# Altium PCB ADF4351.PcbDoc
Units mil, origin at the board's own origin, x right, y up, seen from the top; angles counter-clockwise.
Board outline 1870.03 x 1970 mil, 2 copper layers (Top Layer, Bottom Layer); 69 components, 32 nets, 188 pads, 300 vias.
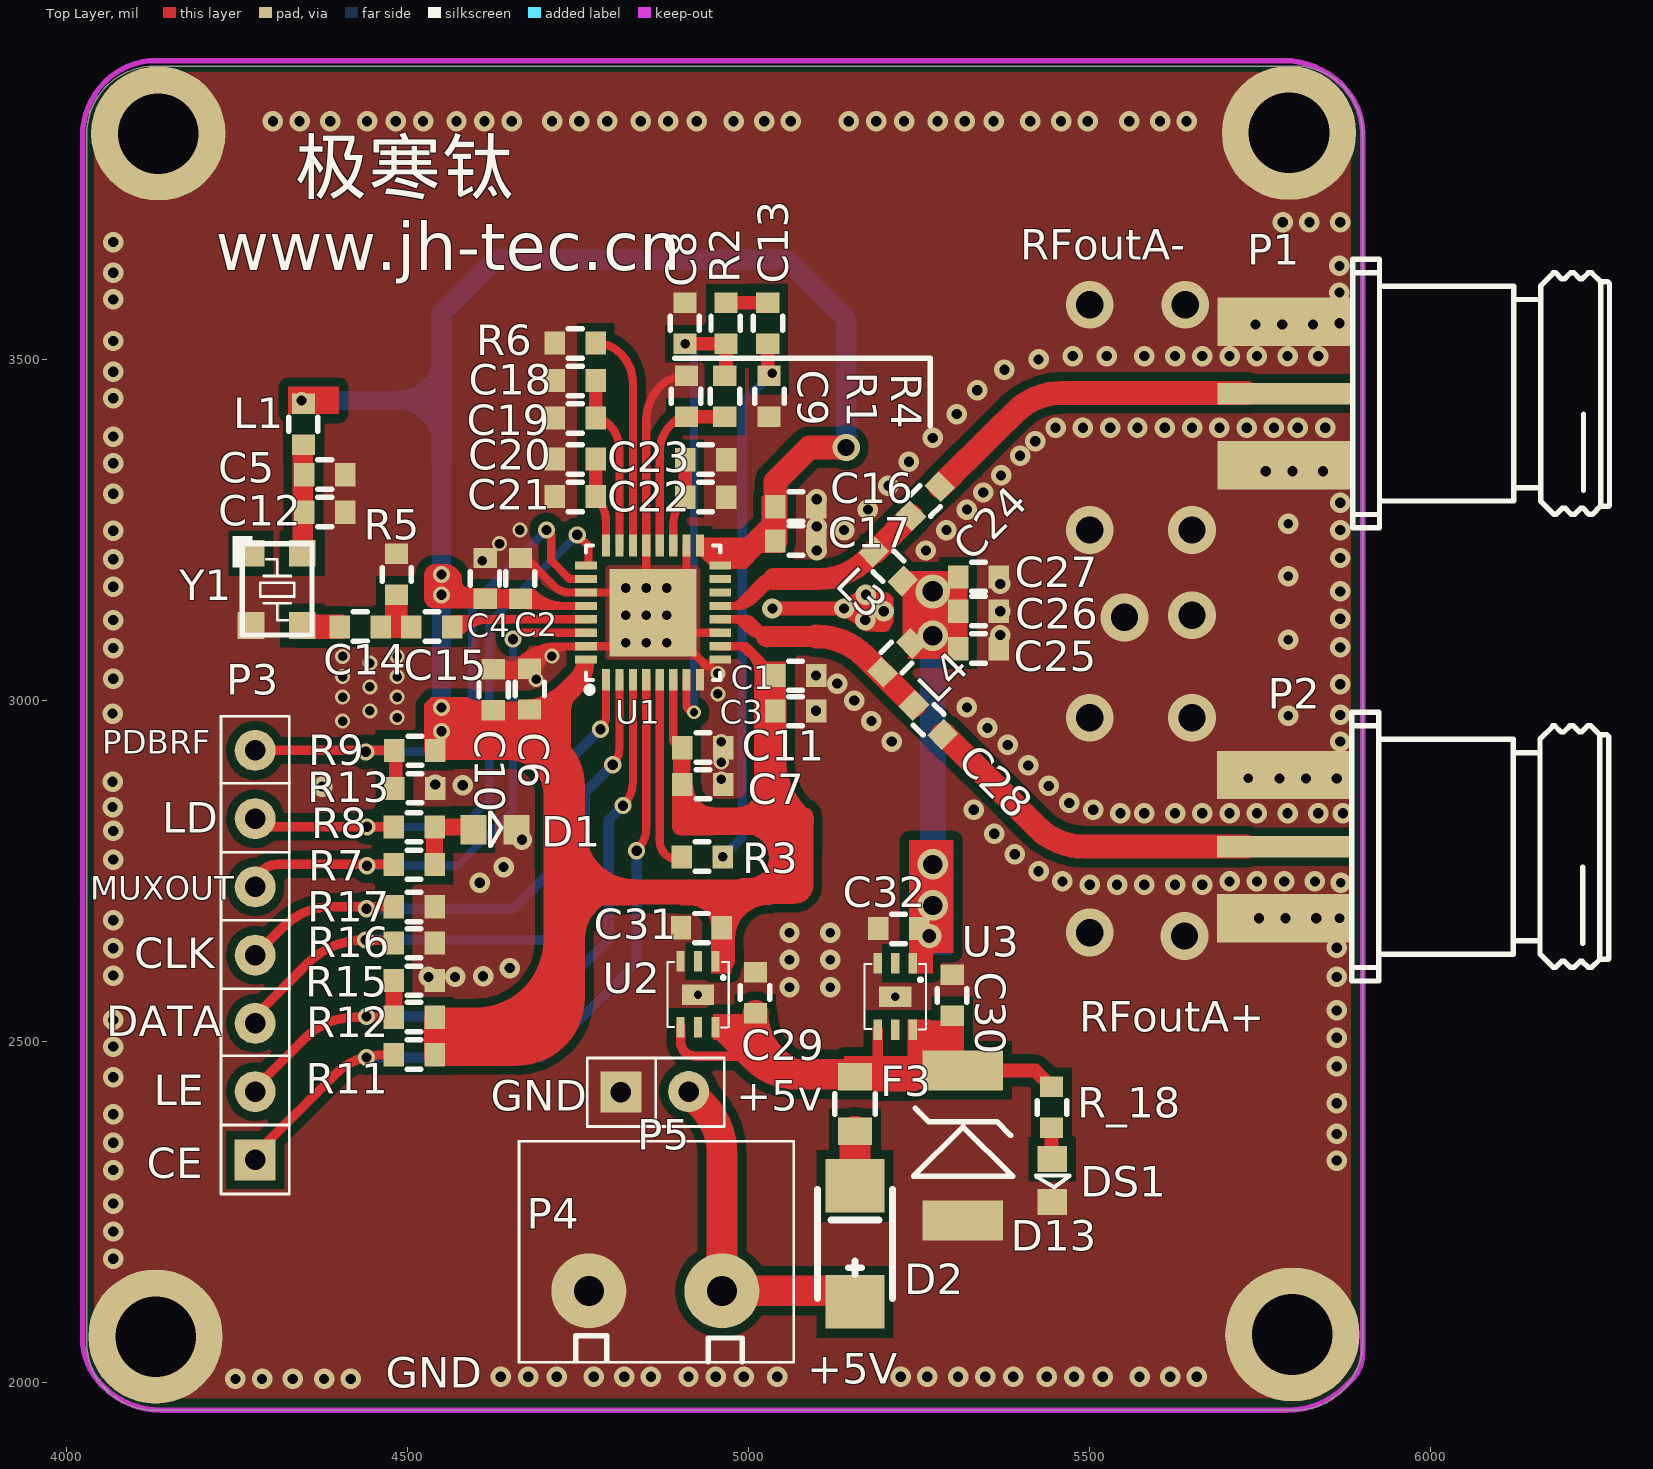
[diagram p0: Top Layer view]
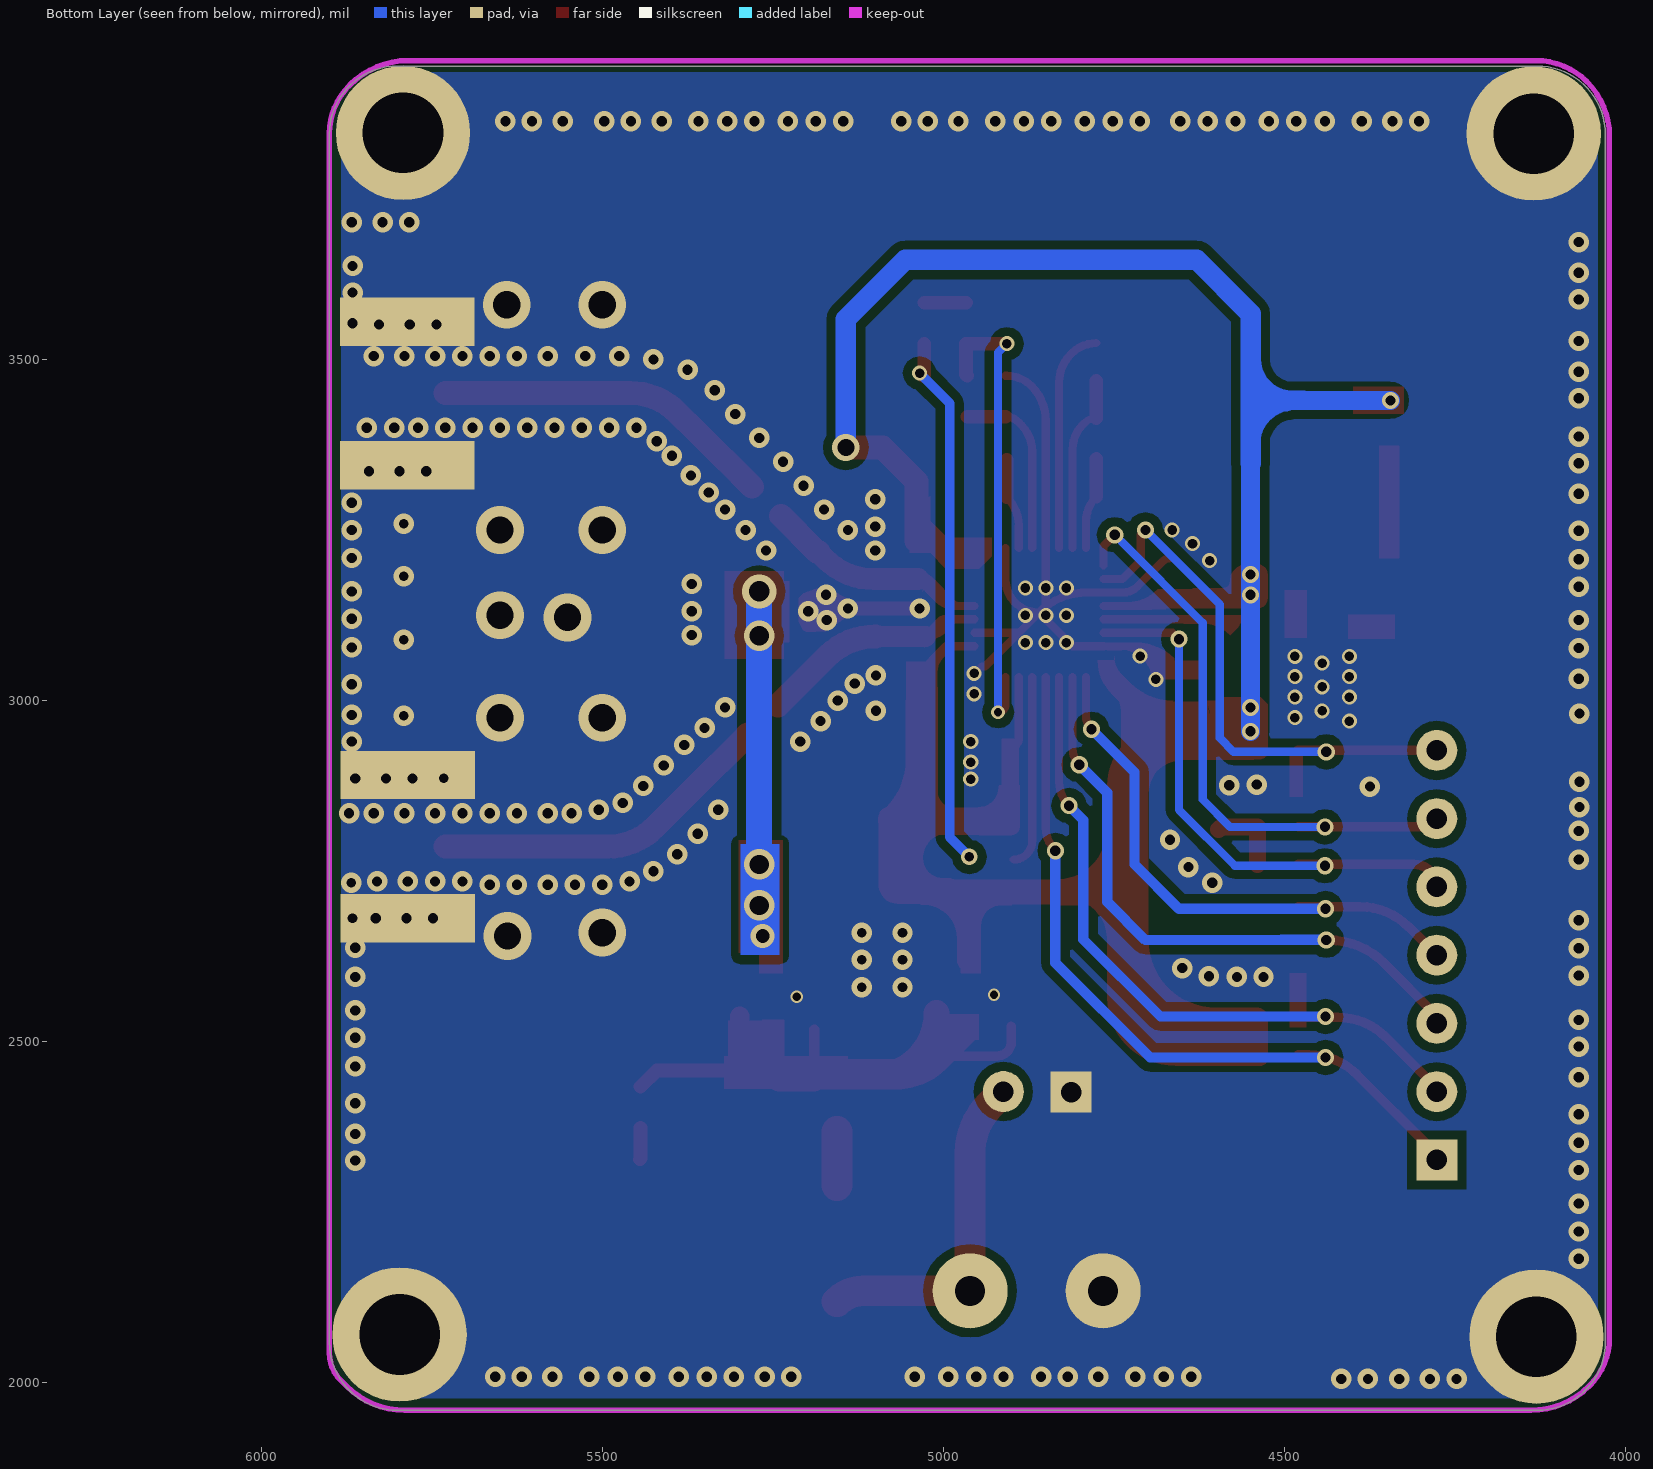
[diagram p1: Bottom Layer view, seen from below]

## Layer stack, top to bottom
Top Solder: solder mask 0.4, Solder Resist, Dk 3.5
Top Layer: signal copper 1.4
Dielectric 1: dielectric 12.6, FR-4, Dk 4.8
Bottom Layer: signal copper 1.4
Bottom Solder: solder mask 0.4, Solder Resist, Dk 3.5

## Board outline
4260,1960 5800.01,1960 ccw(c5800.01,2060) 5900.01,2060 5900.01,2177.99 5900.01,3830 ccw(c5800.01,3830) 5800.01,3930 5180,3930 4129.98,3930 ccw(c4129.98,3830) 4029.98,3830 4029.98,3553 4029.98,2060 ccw(c4129.98,2060) 4129.98,1960 4380,1960

## Design rules (kind name [scope] priority, off if disabled: settings)
Clearance Clearance_1 [InPolygon] p1: gap=13 ignorepadtopadclearanceinfootprint=FALSE except(0: Arc-Hole Track-Hole SMDPad-Hole THPad-Hole Via-Hole Fill-Hole Poly-Hole Region-Hole Text-Hole)
Clearance [All] p2: gap=7 ignorepadtopadclearanceinfootprint=FALSE except(0: Arc-Hole Track-Hole SMDPad-Hole THPad-Hole Via-Hole Fill-Hole Poly-Hole Region-Hole Text-Hole)
PolygonConnect [All] p1: connectstyle=Direct reliefconductorwidth=10 reliefentries=4 polygonreliefangle="90 Angle" airgapwidth=10
RoutingVias [All] p1: holewidth=28 width=50 viastyle="Through Hole" minholewidth=28 minwidth=50 maxholewidth=28 maxwidth=50
SolderMaskExpansion [All] p1: expansion=4
Width [All] p1: maxlimit=196.85 minlimit=0.39 preferedwidth=10
30 further rules are at their usual default settings.

## Classes and differential pairs
component class ADF4351: C1 C2 C3 C4 C5 C6 C7 C8 C9 C10 C11 C12 C13 C14 C15 C16 C17 C18 C19 C20 C21 C22 C23 C24 C25 C26 C27 C28 C29 C30 C31 C32 D1 D2 D13 DS1 F3 L1 L3 L4 P1 P2 P3 P4 P5 R1 R2 R3 R4 R5 R6 R7 R8 R9 R11 R12 R13 R15 R16 R17 R_18 U1 U2 U3 Y1

## Components (designator, comment, footprint, x,y, rotation, side; value= is the part's Value field where it differs from the comment)
C1 "0.1uF" 0603R 5069,3035 r90 top
C2 "0.1uF" 0603R 4664,3179 r0 top
C3 "10pF" 0603R 5069,2983 r90 top
C4 "10pF" 0603R 4612,3179 r0 top
C5 "1uF" 0603R 4379,3333 r270 top
C6 "0.1uF" 0603R 4681,3017 r180 top
C7 "0.1uF" 0603R 4933,2879 r270 top
C8 "188pF" 0603R 4905,3553 r0 top
C9 "85pF" 0603R 4907,3446 r0 top
C10 "10pF" 0603R 4628,3016 r180 top
C11 "10pF" 0603R 4933,2933 r270 top
C12 "100pF" 0603R 4379,3278 r270 top
C13 "2.5nF" 0603R 5030,3553 r180 top
C14 "1nF" 0603R 4431,3110 r270 top
C15 "1nF" 0603R 4536,3110 r270 top
C16 "0.01uF" 0603R 5069.29,3285.96 r270 top
C17 "0.1uF" 0603R 5069.29,3235.96 r270 top
C18 "10pF" 0603R 4746,3467 r90 top
C19 "0.1uF" 0603R 4746,3412 r90 top
C20 "10pF" 0603R 4746,3352 r90 top
C21 "0.1uF" 0603R 4746,3297 r90 top
C22 "10pF" 0603R 4937,3300 r270 top
C23 "0.1uF" 0603R 4937,3355 r270 top
C24 "1uF" 0603R 5257.8,3293.63 r315 top
C25 "0.01uF" 0603R 5337,3078 r270 top
C26 "0.1uF" 0603R 5337,3133 r270 top
C27 "0.01uF" 0603R 5337,3183 r270 top
C28 "1uF" 0603R 5265,2973 r225 top
C29 "0.47uF" 0603R 5008,2572 r0 top
C30 "0.47uF" 0603R 5296.59,2568 r0 top
C31 "0.47uF" 0603R 4931,2665 r90 top
C32 "0.47uF" 0603R 5220,2664 r90 top
D1 "LED" 0603_LED 4625,2810 r0 top
D2 "SS34" SS34 5161,2189 r90 top
D13 "SMBJ05A" SMBJ 5314,2343 r90 top
DS1 "LED" 0603_LED 5444,2300 r270 top
F3 "Fuse" 0805+ 5156,2409 r270 top
L1 "10uH" 0603R 4346,3405 r0 top
L3 "3.9nH" 0603R 5206,3198 r225 top
L4 "3.9nH" 0603R 5216,3064 r315 top
P1 "SMA" SMA_3D 5820,3449 r0 top
P2 "SMA" SMA_3D 5819,2785 r0 top
P3 "Header 7" HDR1X7 4285,2632 r90 top
P4 "Header 2" DC2 4866,2181 r0 top
P5 "Header 2" HDR1X2 4866,2434 r0 top
R1 "1.8k" 0603R 4967,3446 r180 top
R2 "870R" 0603R 4965,3553 r0 top
R3 "NC" 0603R 4932,2773 r270 top
R4 "0R" 0603R 5032,3446 r180 top
R5 "51Ω" 0603R 4486,3185 r180 top
R6 "4K7" 0603R 4746,3522 r90 top
R7 "NC" 0603R 4510,2758 r90 top
R8 "560R" 0603R 4510,2813 r90 top
R9 "0R" 0603R 4511,2925 r90 top
R11 "10K" 0603R 4510,2483 r270 top
R12 "NC" 0603R 4510,2538 r270 top
R13 "NC" 0603R 4511,2873 r270 top
R15 "10K" 0603R 4510,2588 r90 top
R16 "10K" 0603R 4510,2643 r90 top
R17 "10K" 0603R 4510,2696 r90 top
R_18 "2k" 0603R 5446,2404 r180 top
U1 "ADF4351BCPZ" ADF4351 4857,3130 r0 top
U2 "lp5900_3.3V" WSON-6_2.5x2.2mm 4926,2572 r180 top (schematic designator IC1)
U3 "lp5900_3.3V" WSON-6_2.5x2.2mm 5215,2569 r180 top (schematic designator IC2)
Y1 "100MHz" X3225 4309,3163 r270 top
? "Comment" PAD 4134,3832 r180 top
? "Comment" PAD 4130,2069 r180 top
? "Comment" PAD 5796,2072 r180 top
? "Comment" PAD 5791,3833 r180 top

## Footprints (in the part's own frame and the unit in brackets; to place one, negate y for a bottom-side part, rotate by r counter-clockwise, add the part's x,y. Pads: shape width x height; smd on the part's side, far side on the other; paste and mask are expansions set on the pad)
0603_LED [mil]
  rect 37.99x43.31 smd: 1(-28,1) 2(35,1)
  silkscreen extent -4,-23 13,26
0603R [mil]
  rect 34x30 smd: 1(2,-30) 2(2,30)
  silkscreen extent -20,-10 23,10, body extent -17,-38 21,38, height 20
0805+ [mil]
  rect 40x50 smd: 1(-40,0) 2(40,0)
  silkscreen extent -15,-30 15,30, body extent -56,-26 56,26, height 20
ADF4351 [mil]
  rect 12x32 smd mask+5: 1(-65.9,-99.44) 2(-46.21,-99.44) 3(-26.53,-99.44) 4(-6.84,-99.44) 5(12.84,-99.44) 6(32.53,-99.44) 7(52.21,-99.44) 8(71.9,-99.44) 17(71.9,97.44) 18(52.21,97.44) 19(32.53,97.44) 20(12.84,97.44) 21(-6.84,97.44) 22(-26.53,97.44) 23(-46.21,97.44) 24(-65.9,97.44)
  rect 32x12 smd mask+5: 9(101.44,-69.9) 10(101.44,-50.21) 11(101.44,-30.53) 12(101.44,-10.84) 13(101.44,8.84) 14(101.44,28.53) 15(101.44,48.21) 16(101.44,67.9) 25(-95.44,67.9) 26(-95.44,48.21) 27(-95.44,28.53) 28(-95.44,8.84) 29(-95.44,-10.84) 30(-95.44,-30.53) 31(-95.44,-50.21) 32(-95.44,-69.9)
  rect 128x128 smd mask-63.5: 33(3,-1)
  silkscreen extent -96,-118 102,98, body extent -96,-100 102,98, height 43
DC2 [mil]
  round 110 hole 44: 1(-100,-46) 2(95,-46)
  silkscreen extent -202,-151 200,173, body extent -199,-146 195,169, height 433
HDR1X2 [mil]
  rect 60x60 hole 30: 1(-53.15,-7.87)
  round 60 hole 30: 2(46.26,-6.89)
  silkscreen extent -102,-58 98,42, body extent -102,-58 98,42, height 336
HDR1X7 [mil]
  rect 60x60 hole 30: 1(-305,8)
  round 60 hole 30: 2(-205,8) 3(-105,8) 4(-5,8) 5(95,8) 6(195,8) 7(295,8)
  silkscreen extent -355,-42 345,58, body extent -355,-42 345,58, height 336
PAD [mm]
  round 5 hole 3: 0(-0.025,0.025)
  body extent -2.91,-2.5 2.86,2.55, height 10
SMA_3D [mil]
  rect 196.85x31.5 smd: 1(-34,1)
  rect 196.85x70.87 smd: 2(-34,-104) 2(-34,106)
  rect 196.85x70.87 smd far side: 2(-34,-104) 2(-34,106)
  silkscreen extent 65,-196 442,198, body extent -134,-186 428,188, height 171
SMBJ [mm]
  rect 1.5x3 smd: 1(-2.667,0) 2(2.921,0)
  silkscreen extent -1.02,-1.85 1.52,1.83
SS34 [mm]
  rect 2x2.2 smd: 1(-1.778,0.127) 2(2.54,0.127)
  silkscreen extent -1.65,-1.27 2.41,1.52
WSON-6_2.5x2.2mm [mil]
  rect 12x30 smd paste+0 mask+0: 1(-25.59,-46) 2(0,-46) 3(25.59,-46) 4(25.59,51) 5(0,51) 6(-25.59,51)
  rect 47.24x29.53 smd: 7(0,3)
  silkscreen extent -45,-45 45,51, body extent -39,-45 39,53, height 31
X3225 [mil]
  rect 39.37x39.37 smd: 1(-53,-38) 2(53,-38) 3(53,37) 4(-53,37)
  silkscreen extent -78,-65 67,51, body extent -61,-50 65,48, height 28

## Part data
C1 C2 C3 C4 C5 C6 C7 C8 C9 C10 C11 C12 C13 C14 C15 C16 C17 C18 C19 C20 C21 C22 C23 C24 C25 C26 C27 C28: library part C, "Unpolar Capacitor"
C29 C30 C31 C32: library part cap
D1: library part LED_0603
D2: library part D, "1N4148"
D13: library part SMBJ, "TVS"
F3: library part "Fuse 2"
L1 L3 L4: library part INDUCTOR
P1 P2: "Port for HF signal"
P3: "Header, 7-Pin"
P4 P5: "Header, 2-Pin"
R1 R2 R3 R4 R5 R6 R7 R8 R9 R11 R12 R13 R15 R16 R17: library part R, "Resister"
R_18: library part RES0805
U1: "Wideband Synthesizer with Integrated VCO"
U2 U3: library part lp5900
Y1: library part XTALCOSC, "XTAL"

## Via types
v1: diameter 30, hole 15, Top Layer to Bottom Layer, tented both sides, 216 vias
v2: diameter 22, hole 14, Top Layer to Bottom Layer, tented both sides, 32 vias
v3: diameter 25, hole 15, Top Layer to Bottom Layer, tented both sides, 19 vias
v4: diameter 30, hole 14, Top Layer to Bottom Layer, tented both sides, 13 vias
v5: diameter 70, hole 40, Top Layer to Bottom Layer, tented both sides, 10 vias
v6: diameter 45, hole 28, Top Layer to Bottom Layer, tented both sides, 3 vias
v7: diameter 18, hole 12, Top Layer to Bottom Layer, tented both sides, 2 vias
v8: diameter 35, hole 20, Top Layer to Bottom Layer, tented both sides, 1 vias
v9: diameter 50, hole 30, Top Layer to Bottom Layer, tented both sides, 1 vias
v10: diameter 40, hole 25, Top Layer to Bottom Layer, tented both sides, 1 vias
v11: diameter 24, hole 14, Top Layer to Bottom Layer, tented both sides, 1 vias
v12: diameter 20, hole 12, Top Layer to Bottom Layer, tented both sides, 1 vias

## Nets (pads, with @x,y where several pads share a name; then routed paths per layer and width w, separated by ;. In a path a pad name is that pad's centre, name@x,y a point inside that pad or via, vN(x,y) a via of type N, cw(c..) or ccw(c..) an arc to the next point about the centre after c; other vN are vias at no path point)
5V: C29.1 C30.1 D13.2 F3.1 R_18.1 U2.4 U2.6 U3.4 U3.6 | length 693.9
  Top Layer w14: U2.4@4900.41,2523 4900.41,2500.59 ccw(c4922,2500.59) 4922,2479 5011.29,2479 ccw(c5011.29,2492.18) 5024.47,2492.18
  Top Layer w15: 5187.59,2446 ccw(c5183.2,2450.39) 5189.41,2450.39 ; 5189.41,2446 U3.4
  Top Layer w20: D13.2 5420,2458 R_18.1
  Top Layer w28: 5250.59,2483 ccw(c5250.59,2531) 5298.59,2531 C30.1
  Top Layer w38: C29.1 ccw(c5103,2542) 5024.47,2492.18 ccw(c5103,2542) F3.1@5133.55,2454.16 ; 5189.41,2446 5240.59,2446
AVDD: C1.2 C2.1 C3.2 C4.1 C6.2 C7.1 C10.2 C11.1 C16.1 C17.1 C31.1 L1.2 R9.1 R11.2 R12.2 U1.6 U1.10 U1.16 U1.17 U1.28 U1.32 U2.1 | length 2219.6
  Top Layer w12: C2.1@4666,3148 ccw(c4685.69,3167.69) 4685.69,3139.84 ; 4696.69,3138.84 U1.28@4765.5,3138.84 ; U1.6@4889.53,3034.5 4889.53,2944.47 ccw(c4903,2944.47) C11.1 ; U1.10@4954.5,3079.79 4996.21,3079.79 C1.2
  Top Layer w35: C17.1 5039.29,3321.29 5089,3371 v10(5143,3371)
  Bottom Layer w28: v3(4345,3440) 4485,3440 cw(c4485,3375) 4550,3375 ; v3(4550,2955) v3(4550,3185) 4550,3348
  Bottom Layer w30: 4550,3348 4550,3375 4550,3567 4629,3646 5056,3646 5143,3559 v10(5143,3371)
  other v3: 4550,2990 4550,3155
CE: P3.1 R11.1 U1.4 | length 1142.2
  Top Layer w12: v3(4836,2780) ccw(c4801.82,2814.18) 4850.16,2814.18 U1.4@4850.16,3034.5
  Top Layer w14: P3.1 cw(c4296.31,2327) 4282.66,2340.66 4393.71,2451.71 cw(c4464.42,2381) 4464.42,2481 R11.1
  Bottom Layer w15: v3(4440,2477) 4697,2477 4836,2616 v3(4836,2780)
CLK: P3.4 R17.2 U1.1 | length 837.8
  Top Layer w12: v3(4783,2958) ccw(c4763.44,2977.56) 4791.1,2977.56 U1.1@4791.1,3034.5
  Top Layer w14: P3.4 4318.71,2668.71 cw(c4389.42,2598) 4389.42,2698 R17.2
  Bottom Layer w15: v3(4440,2695) 4655,2695 4720,2760 4720,2895 v3(4783,2958)
DATA: P3.3 R16.2 U1.2 | length 1012.5
  Top Layer w12: v3(4801,2906) ccw(c4777.37,2929.63) 4810.79,2929.63 U1.2@4810.79,3034.5
  Top Layer w14: P3.3 cw(c4289.07,2527) P3.3@4280.54,2535.54 ; P3.3@4278.54,2539.54 4354.94,2615.94 ; 4353.8,2615.09 cw(c4435.66,2533.23) 4435.66,2649 R16.2@4480,2649
  Bottom Layer w12: v3(4439,2649) 4441,2651 4504.58,2651
  Bottom Layer w15: v3(4439,2649) 4704,2649 4760,2705 4760,2865 v3(4801,2906)
GND: ?.0 C1.1 C2.2 C3.1 C4.2 C5.2 C6.1 C7.2 C8.2 C9.2 C10.1 C11.2 C12.2 C16.2 C17.2 C18.2 C19.2 C20.2 C21.2 C22.2 C23.2 C25.2 C26.2 C27.2 C29.2 C30.2 C31.2 C32.2 D1.2 D13.1 DS1.2 P1.2 P2.2 P4.1 P5.1 R4.2 R5.1 R6.2 R13.2 R15.1 R16.1 R17.1 U1.8 U1.9 U1.11 U1.18 U1.21 U1.27 U1.31 U1.33 U2.3 U2.7 U3.3 U3.7 Y1.2 | length 1139.4
  Top Layer w12: C2.2 cw(c4666,3189.69) 4679.66,3203.34 4716,3167 ccw(c4736.45,3187.45) 4736.45,3158.53 4765.5,3158.53 4789.05,3158.53 cw(c4789.05,3058.53) U1.33@4859.76,3129.24 ; U1.31@4765.5,3079.79 4810.79,3079.79 U1.33 ; v2(4850,3125) 4855.52,3125 U1.33@4859.76,3129.24 ; C9.2 4907.21,3476 ccw(c4907.21,3424.79) 4871,3461 ccw(c4921.32,3410.68) 4850.16,3410.68 4850.16,3223.5 4850.16,3138.84 U1.33@4859.76,3129.24 ; U1.18@4909.21,3223.5 4909.21,3178.21 cw(c4860,3178.21) U1.33 ; 4944,3050 4939,3050 U1.33@4889.53,3099.47 ; U1.11@4954.5,3099.47 U1.33@4889.53,3099.47 ; U1.33 U1.33@4889.53,3099.47
  Top Layer w20: v1(5035,3135) v1(5140,3135)
  other v1: 4248,2006 4287,2006 4332,2006 4378,2006 4417,2006 4637,2009 4677,2009 4719,2009 4773,2009 4818,2009 4857,2009 4912,2009 4952,2009 4993,2009 5042,2009 5223,2009 5262,2009 5307,2009 5347,2009 5388,2009 5437,2009 5477,2009 5519,2009 5573,2009 5618,2009 5657,2009 4069,2182 4069,2222 4069,2263 4069,2312 5862,2326 4069,2352 5862,2365 4069,2394 5862,2410 4069,2448 5862,2464 4069,2493 5862,2506 4069,2532 5862,2546 4531,2595 4570,2595 5862,2595 4611,2596 4069,2597 4650,2608 4069,2637 5862,2638 4069,2678 5748,2681 5787,2681 5832,2681 5500,2730 5540,2730 5580,2730 5625,2730 5665,2730 4606,2733 5460,2735 5705,2735 5745,2735 5785,2735 5830,2735 5425,2750 4641,2756 4069,2767 5390,2775 4668,2796 5360,2805 4069,2809 5545,2835 5580,2835 5625,2835 5665,2835 5705,2835 5745,2835 5790,2835 5835,2835 5871,2835 5330,2840 5505,2840 4068,2844 5470,2850 4375,2874 5440,2875 4581,2876 4541,2877 4068,2881 5778,2886 5817,2886 5862,2886 5410,2905 5380,2935 5210,2940 5867,2940 5350,2960 5180,2970 5867,2979 4068,2981 5099,2985 5320,2990 5155,3000 5867,3024 5130,3025 4069,3032 5099,3037 4069,3077 5867,3078 5369,3096 4069,3118 5171,3118 5867,3120 5198,3131 5369,3131 5172,3155 5867,3160 4069,3167 5369,3171 4069,3207 5867,3209 5100,3220 5260,3220 4069,3249 5140,3250 5290,3250 5867,3250 5100,3255 5175,3280 5320,3280 5867,3290 5100,3295 4069,3303 5344,3305 5205,3315 5370,3330 5758,3336 5797,3336 5842,3336 4069,3348 5235,3350 5398,3359 5420,3380 5270,3385 4069,3387 5450,3400 5490,3400 5530,3400 5570,3400 5610,3400 5650,3400 5690,3400 5730,3400 5770,3400 5805,3400 5845,3400 5305,3420 4069,3443 5335,3455 4069,3482 5375,3485 5425,3500 5475,3505 5525,3505 5580,3505 5625,3505 5665,3505 5705,3505 5745,3505 5790,3505 5835,3505 4069,3527 5743,3551 5782,3551 5827,3551 5866,3553 4069,3588 5866,3598 4069,3627 5866,3637 4069,3672 5783,3701 5822,3701 5867,3701 4303,3849 4342,3849 4387,3849 4441,3849 4483,3849 4523,3849 4572,3849 4613,3849 4653,3849 4712,3849 4752,3849 4793,3849 4842,3849 4882,3849 4924,3849 4978,3849 5023,3849 5062,3849 5147,3849 5187,3849 5228,3849 5277,3849 5317,3849 5359,3849 5413,3849 5458,3849 5497,3849 5558,3849 5603,3849 5642,3849
  other v2: 4960,2885 4960,2910 4960,2940 4405,2970 4485,2975 4445,2985 4405,3005 4485,3005 4955,3010 4445,3020 4688.76,3031 4405,3035 4485,3035 4955,3040 4445,3055 4405,3065 4485,3065 4711.82,3065.11 4820,3085 4850,3085 4880,3085 4820,3125 4880,3125 4820,3165 4850,3165 4880,3165 4610,3205 4635,3230 4665,3250
  other v4: 5060,2580 5120,2580 5060,2620 5120,2620 5060,2660 5120,2660 5866,2681 5868,2733 5732,2886 5791,2978 5791,3089 5791,3182 5791,3259
  other v5: 5639,2655 5500,2660 5500,2975 5650,2975 5551,3122 5650,3125 5500,3250 5650,3250 5500,3580 5640,3580
  other v7: 5215,2566 4926,2569
LD: P3.6 R8.2 U1.25 | length 886.1
  Top Layer w12: v3(4749,3243) 4765.5,3226.5 U1.25@4765.5,3197.9
  Top Layer w14: P3.6 ccw(c4289,2827) 4289,2815 R8.2
  Bottom Layer w12: v3(4441,2815) 4580,2815 4620,2855 4620,3114 4740,3234
LE: P3.2 R12.1 R15.2 U1.3 | length 1045.1
  Top Layer w12: v3(4816,2846) ccw(c4781.06,2880.94) 4830.47,2880.94 U1.3@4830.47,3034.5
  Top Layer w14: P3.2 cw(c4289.07,2427) 4280.54,2435.54 4351.71,2506.71 cw(c4422.42,2436) 4422.42,2536 R12.1
  Bottom Layer w15: v3(4440,2537) 4682,2537 4795,2650 4795,2825 v3(4816,2846)
MUXOUT: P3.5 R7.2 U1.30 | length 834.2
  Top Layer w12: v3(4655,3090) 4664.47,3099.47 U1.30@4765.5,3099.47
  Top Layer w14: P3.5 cw(c4310,2727) 4310,2760 R7.2
  Bottom Layer w12: v3(4441,2758) 4573,2758 4655,2840 v3(4655,3090)
NetC5_1: C5.1 C12.1 L1.1 Y1.4
NetC8_1: C8.1 R1.1 R2.1 U1.7 | length 710.9
  Top Layer w12: U1.7@4909.21,3034.5 4909.21,2993.79 ccw(c4920,2993.79) v12(4920,2983)
  Top Layer w20: v2(4907,3523) R2.1 4967,3478 R1.1
  Bottom Layer w12: v2(4907,3523) 4920,3510 v12(4920,2983)
NetC9_1: C9.1 R1.2 U1.20 | length 267.6
  Top Layer w12: U1.20@4869.84,3223.5 4869.84,3364.99 cw(c4925.01,3364.99) 4886,3404 4890.22,3408.22 cw(c4909,3389.44) C9.1
  Top Layer w20: C9.1 R1.2
NetC13_1: C13.1 R2.2 | length 61
  Top Layer w20: R2.2 C13.1
NetC13_2: C13.2 R3.2 R4.1 | length 787.1
  Top Layer w20: C13.2 5028,3478 R4.1
  Bottom Layer w14: v11(4962,2771) 4991,2800 4991,3436 v2(5035,3480)
NetC14_1: C14.1 Y1.3
NetC14_2: C14.2 C15.1 R5.2
NetC15_2: C15.2 U1.29 | length 199.5
  Top Layer w12: C15.2@4566,3119.16 U1.29@4765.5,3119.16
NetC18_1: C18.1 C19.1 U1.23 | length 262.6
  Top Layer w11: C19.1 cw(c4776,3389.86) 4793.07,3406.93
  Top Layer w12: 4793.07,3406.93 4796,3404 cw(c4760.3,3368.3) 4810.79,3368.3 U1.23@4810.79,3223.5
  Top Layer w20: C19.1 C18.1
NetC20_1: C20.1 C21.1 U1.24 | length 134.5
  Top Layer w12: C21.1 cw(c4739.54,3262.54) 4791.1,3262.54 U1.24@4791.1,3223.5
  Top Layer w20: C21.1 C20.1
NetC22_1: C22.1 C23.1 U1.19 | length 134.2
  Top Layer w12: U1.19@4889.53,3223.5 4889.53,3255.82 cw(c4949.18,3255.82) C22.1
  Top Layer w20: C22.1 C23.1
NetC24_1: C24.1 L3.1 U1.13 | length 334.3
  Top Layer w12: U1.13@4954.5,3138.84 4987.84,3138.84 5021,3172 5040,3172
  Top Layer w32: 5037,3178 5102.15,3178 ccw(c5102.15,3278) 5172.86,3207.29 L3.1
  Top Layer w35: L3.1 ccw(c5183.37,3221.24) 5185.81,3218.81 C24.1
NetC24_2: C24.2 P1.1 | length 502.2
  Top Layer w35: C24.2 5318.79,3351.79 cw(c5320.2,3350.37) 5320.2,3352.37 5362.63,3394.8 5389.54,3421.71 cw(c5460.25,3351) 5460.25,3451 P1.1@5730,3451
NetC28_1: C28.1 L4.1 U1.12 | length 348.3
  Top Layer w12: U1.12@4954.5,3119.16 4990.84,3119.16 5012,3098 5040,3098
  Top Layer w30.5: 5026,3094 5099.75,3094
  Top Layer w35: 5099.75,3094 cw(c5099.75,2994) 5170.46,3064.71 C28.1
NetC28_2: C28.2 P2.1 | length 508.8
  Top Layer w35: C28.2 cw(c5284.8,2945.54) 5288.21,2948.96 5369.8,2867.37 5421.88,2815.29 ccw(c5492.59,2886) 5492.59,2786 P2.1@5730,2786
NetD1_1: D1.1 R7.1 R8.1 | length 113.1
  Top Layer w25: R7.1 R8.1 4587.34,2815 cw(c4587.34,2801.34) D1.1
NetD2_1: D2.1 P4.2 P5.2 | length 507.3
  Top Layer w45: P5.2 4931.71,2407.66 cw(c4861,2336.95) 4961,2336.95 P4.2 5117.37,2135 cw(c5117.37,2080.37) D2.1
NetD2_2: D2.2 F3.2 | length 80
  Top Layer w45: D2.2 F3.2
NetDS1_1: DS1.1 R_18.2 | length 46.6
  Top Layer w20: R_18.2 5444,2329 ccw(c5445,2329) DS1.1
NetR3_1: R3.1 U1.5 | length 283
  Top Layer w12: U1.5@4869.84,3034.5 4869.84,2794.16 ccw(c4897,2794.16) R3.1@4897,2767
NetR6_1: R6.1 U1.22 | length 330.6
  Top Layer w12: R6.1 cw(c4776,3473.3) 4811.85,3509.15 4813,3508 cw(c4770.82,3465.82) 4830.47,3465.82 U1.22@4830.47,3223.5
PDBRF: P3.7 R9.2 R13.1 U1.26 | length 831.9
  Top Layer w12: v3(4704,3250) 4711,3243 4711,3205 4737.79,3178.21 U1.26@4765.5,3178.21
  Top Layer w14: P3.7 R9.2
  Bottom Layer w12: v3(4439,2925) 4575,2925 4595,2945 4595,3141 v3(4704,3250)
VOUT: C25.1 C26.1 C27.1 C32.1 L3.2 L4.2 U3.1 | length 449
  Bottom Layer w38: v6@5270,2711 v9(5270,3160)
  other v6: 5270,2700 5270,2760 5270,3095
  other v8: 5265,2655
pads on no net: U1.14 U1.15 U2.2 U2.5 U3.2 U3.5 Y1.1

## Polygon pours and split planes (outlines as drawn)
GND on Top Layer "Bottom Layer-b" (solid, remove dead copper, pour order 2): 4880,1970 5790,1970 5800.01,1970 ccw(c5800.01,2070) 5900.01,2070 5900.01,2118.99 5900.01,3830 ccw(c5800.01,3830) 5800.01,3930 5700,3930 4130,3930 ccw(c4130,3830) 4030,3830 4030,3740 4030,2070 ccw(c4130,2070) 4130,1970 4900,1970
GND on Bottom Layer "Bottom Layer-b" (solid, remove dead copper, pour order 4): 4350,1970 5800,1970 ccw(c5800,2070) 5900,2070 5900,2170 5900,3840 ccw(c5800,3840) 5800,3940 5240,3940 4130,3940 ccw(c4130,3840) 4030,3840 4030,3450 4030,2070 ccw(c4130,2070) 4130,1970 4470,1970

## Keep-outs
Keep-Out Layer:
  lines w8: 4180,1960 5789.38,1960 ccw(c5789.38,2080.71) 5874.74,1995.36 5883.56,2004.17 ccw(c5843.84,2043.89) 5900.01,2043.89 5900.01,2177.99 5900.01,3831.17 ccw(c5801.18,3831.17) 5871.06,3901.05 5869.47,3902.64 ccw(c5784.11,3817.29) 5784.11,3938 5717,3938 4131.84,3938 ccw(c4131.84,3832.16) 4057,3907 ccw(c4136.67,3827.33) 4024,3827.33 4024,3807 4024,2065.79 ccw(c4121.91,2065.79) 4052.68,1996.56 4053.88,1995.36 ccw(c4139.24,2080.71) 4139.24,1960 4197,1960

## Other copper
Top Layer:
  region net GND: 5190,3120 5190,3145 5140,3145 5140,3120
  rectangle net AVDD: 4325,3420 4400,3460
  rectangle net AVDD: 4340,3445 4365,3455
  rectangle net AVDD: 5023,2968 5055,3057
  rectangle net VOUT: 5235,2630 5300,2795.81
  rectangle net VOUT: 5235,2600 5270,2690
  rectangle net 5V: 5060,2430 5210,2475
  rectangle net AVDD: 4945,2600 4975,2670
  rectangle net 5V: 5232.59,2431 5266.59,2533
  rectangle net AVDD: 4834,2701 5030,2738
  rectangle net AVDD: 4900,2803 5082,2843
  rectangle net AVDD: 4889.53,2864 4915,2944.47
  rectangle net 5V: 5262.59,2467 5315.59,2531
  rectangle net 5V: 5139.59,2431 5321.59,2479
  rectangle net 5V: 4948,2503 5021,2541
  rectangle net PDBRF: 4473,2859 4493,2930
  rectangle net LE: 4468,2521 4493,2601
  rectangle net AVDD: 4674,3133.32 4708.65,3145
  rectangle net AVDD: 4644.53,3138.2 4685.38,3163.67
  rectangle net AVDD: 4612,2968 4697,2999
  rectangle net GND: 4618,3031 4695,3059
  rectangle net AVDD: 4615,2974 4689,2997
  rectangle net NetC5_1: 4332,3208 4362,3374
  rectangle net NetC14_1: 4338,3090 4407,3126
  rectangle net NetC14_2: 4467,3092 4500,3162
  rectangle net AVDD: 4608,3135 4679,3163.67
  rectangle net VOUT: 5225.8,3085.37 5250.8,3175.37
  rectangle net VOUT: 5234,3061 5321,3190
  region net GND: 5131,3144 5165.99,3163.44 5184.83,3164.61 5205.57,3157.05 5212,3150.91 5212,3114.61 5205.26,3103.47 5199.36,3100.38 5172.39,3101.85 5132,3129 5133,3143
  region net AVDD: 4994.5,3238.5 5019.5,3263.5 5019.5,3299.5 5020.5,3298.5 5049.5,3298.5 5049.5,3216.5 5019.5,3216.5 4996.5,3193.5 4947.5,3193.5 4929.5,3211.5 4929.5,3238.5
  region net AVDD: 4635,3165 4590,3165 cw(c4590,3175) 4580,3175 ccw(c4555,3175) 4555,3200 4540,3200 ccw(c4540,3185) 4525,3185 4525,3150 ccw(c4540,3150) 4540,3135 4608,3135 ccw(c4608,3162) 4635,3162
  region net AVDD: 4605,3000 cw(c4605,3030) 4588.42,3005 4535,3005 4525,2995 4525,2925.1 ccw(c4535.88,2925.05) 4535.83,2914.17 4594.17,2914.17 ccw(c4594.17,2930) 4610,2930 4610,2985 cw(c4625,2985) 4625,3000
  region net AVDD: 5008.59,3001.8 5008.59,2866.59 cw(c4986,2866.59) 4986,2844 ccw(c4986,2831) 4973,2831 4973,2809 5084,2809 ccw(c5084,2813) 5088,2813 ccw(c5088,2820.25) 5095.25,2820.25 5095.25,2830 cw(c5101.16,2835.9) 5092.81,2835.9 5092.81,2837.22 5089.22,2840.81 ccw(c5084.54,2836.12) 5084.54,2842.75 5084.29,2843 cw(c5155,2913.71) 5055,2913.71 5055,2996.5 ccw(c4971.77,2996.5) 5030.62,3055.35 5022.66,3047.38 ccw(c5058.04,3012) 5008,3012
  region net AVDD: 4995,2805 cw(c4995,2770) 5030,2770 cw(c5000,2770) 5000,2740 4995,2740 ccw(c4995,2705) 4960,2705 ccw(c4962.48,2705) 4962.48,2702.52 5067.52,2702.52 ccw(c5067.52,2730) 5095,2730 5095,2830 ccw(c5082,2830) 5082,2843 5028,2843 ccw(c5028,2815) 5000,2815 5000,2810 cw(c4995,2810)
  region net AVDD: 4945,2670 ccw(c4915,2670) 4915,2700 4900,2700 4900,2720 cw(c4910,2720) 4910,2730 5020,2730 cw(c5020,2710) 5040,2710 cw(c5031,2710) 5031,2701 5030,2701 ccw(c5030,2651) 4980,2651 4980,2620 cw(c4960,2620) 4960,2600 cw(c4960,2608.41) 4951.59,2608.41 4951.59,2646.59 cw(c4955,2646.59) 4955,2650
  region net AVDD: 4600,2550 ccw(c4600,2650) 4700,2650 4700,2760 cw(c4715,2760) 4715,2775 ccw(c4780,2775) 4780,2710 4820,2710 ccw(c4820,2650) 4760,2650 4760,2565 cw(c4660,2565) 4660,2465 4535,2465 cw(c4535,2475) 4525,2475 4525,2535 cw(c4540,2535) 4540,2550
  region net AVDD: 4739.57,2932.1 4739.57,2984.82 cw(c4775.18,2984.82) 4750,3010 4737.68,2997.68 cw(c4695,3040.36) 4695,2980 4695,2957.07 cw(c4677.93,2957.07) 4690,2945 ccw(c4721.15,2976.15) 4721.15,2932.1
  region net AVDD: 4650,2912.67 cw(c4650,2862.67) 4700,2862.67 4700,2755 ccw(c4755,2755) 4755,2700 4835,2700 ccw(c4835,2705) 4840,2705 4840,2732 ccw(c4834,2732) 4834,2738 cw(c4834,2812) 4760,2812 4760,2875 ccw(c4670,2875) 4670,2965 4655,2965 ccw(c4655,2930) 4620,2930
  region net AVDD: 4550,2944 4566,2944 ccw(c4566,2990) 4612,2990 4711,2990 cw(c4711,2982) 4719,2982 cw(c4650,2982) 4650,2913 4545,2913 ccw(c4545,2918) 4550,2918
  region net AVDD: 4900,2803 cw(c4900,2815) 4888,2815 4888,2875 cw(c4889,2875) 4889,2876 4917,2876 cw(c4917,2874) 4919,2874 ccw(c4949,2874) 4949,2844 4949,2805 cw(c4947,2805) 4947,2803
  region net 5V: 4948,2508 4995.71,2460.29 ccw(c5066.42,2531) 5066.42,2431 5102,2431 cw(c5102,2474.46) 5071.27,2443.73 5000,2515 cw(c4997.59,2517.41) 4997.59,2514 4949,2514
  region net AVDD: 4750,3065 cw(c4713.79,3065) 4739.39,3039.39 4726,3026 cw(c4663.23,3088.77) 4663.23,3000 4663,3000 4688.88,2974.12 ccw(c4694,2979.24) 4694,2972 ccw(c4694,3025.11) 4731.56,2987.56 4753.49,3009.49 ccw(c4703.99,3059) 4774,3059 4751.41,3059 cw(c4751.41,3062.41) 4749,3060
  region net GND: 4717.53,3085 ccw(c4717.53,3006.47) 4662,3062 4662,3047.66 ccw(c4675.66,3047.66) 4666,3038 ccw(c4682.9,3054.9) 4682.9,3031 4695,3031 cw(c4738,3031) 4738,3074 4759.71,3074 ccw(c4759.71,3079.79) 4765.5,3079.79 ccw(c4760.29,3079.79) 4760.29,3085
  region net NetC15_2: 4648,3113 4621.04,3113 ccw(c4621.04,3054.96) 4580,3096 4568.12,3107.88 cw(c4573.24,3113) 4566,3113 ccw(c4566,3122.28) 4572.56,3115.72 4576,3119.16 4636.96,3119.16 cw(c4636.96,3104.96) 4647,3115
  region net AVDD: 4685.71,3163.34 ccw(c4731.58,3209.21) 4731.58,3144.34 4733.71,3144.34 cw(c4719.22,3144.34) 4729.47,3134.1 4728.71,3133.34 4705.27,3133.34 cw(c4705.27,3170.9) 4678.71,3144.34 4678.71,3146.44 cw(c4702.61,3146.44)
  region net NetC28_1: 4982,3114 4993.64,3102.36 ccw(c5030,3138.73) 5030,3087.3 5030,3099 5007.54,3121.46 ccw(c4999.01,3112.95) 4999,3125 4984,3125 ccw(c4986.41,3122.59) 4983,3122.59 4983,3115
  region net NetC24_1: 4981,3145 5018.05,3182.05 cw(c5030,3170.1) 5030,3187 5030,3159.83 cw(c5036.24,3162.41) 5030,3165 5025,3158 5011.73,3144.73 cw(c4983.42,3173.03) 4983.41,3133 cw(c4983.41,3136.41) 4981,3134 cw(c4983.41,3136.41) 4980,3136.41 4980,3145
  region net NetC28_1: 5016.58,3088.63 5022,3083.2 5022,3083 5025.59,3079.41 ccw(c5029,3082.83) 5029,3078 5029,3084.89 cw(c5032.41,3084.89) 5030,3087.3 ccw(c5028.94,3086.24) 5028.94,3087.74 5023.29,3087.74 ccw(c5021.15,3085.61) 5021.15,3088.63
  region net AVDD: 4976,3076 cw(c4976,3049.44) 4994.78,3068.22 5000,3063 cw(c4978.27,3041.27) 5009,3041.27 5009,3001.8 ccw(c5056.8,3001.8) 5023,2968 5032.39,2977.39 ccw(c5006.79,3003) 5043,3003 5043,3042.93 ccw(c5025.93,3042.93) 5038,3055 5035.97,3055 cw(c5035.97,3095.97) 5007,3067 4997.63,3076.37 cw(c5001.04,3079.79) 4996.21,3079.79 4983.73,3079.79 ccw(c4983.73,3070.27) 4977,3077
Bottom Layer:
  rectangle net VOUT: 5240,2627 5297.63,2790
  region net AVDD: 4488,3454 ccw(c4488,3501) 4535,3501 4547,3501 ccw(c4547,3507) 4553,3507 4553,3433 cw(c4550,3433) 4550,3430 4536,3430 ccw(c4536,3424) 4530,3424 4500,3424 cw(c4500,3454) 4470,3454

## Silkscreen, mask and mechanical layers (free items; w line width, h text height)
Top Overlay:
  lines w8: 4892,3502 5266,3502 5266,3403
  text "极寒钛" at 4335,3718 h135
  text "RFoutA-" at 5398,3646 h45
  text "www.jh-tec.cn" at 4219,3607 h120
  text "PDBRF" at 4053,2922 h35
  text "LD" at 4141,2806 h45
  text "MUXOUT" at 4035,2708 h35
  text "CLK" at 4100,2608 h45
  text "RFoutA+" at 5485,2515 h45
  text "DATA" at 4059,2508 h45
  text "LE" at 4128,2407 h45
  text "GND" at 4622,2399 h45
  text "+5v" at 4982.1,2398.65 h45
  text "CE" at 4118,2300 h45
  text "+5V" at 5086,1999 h45
  text "GND" at 4468,1993 h45
Top Solder:
  rectangle: 4809,3073 4909,3183